# Altium PCB PCB2.PcbDoc
Units mm, origin at the board's own origin, x right, y up, seen from the top; angles counter-clockwise.
Board outline 99.57 x 42.8 mm, 2 copper layers (Top Layer, Bottom Layer); 8 components, 11 nets, 25 pads, 4 vias.
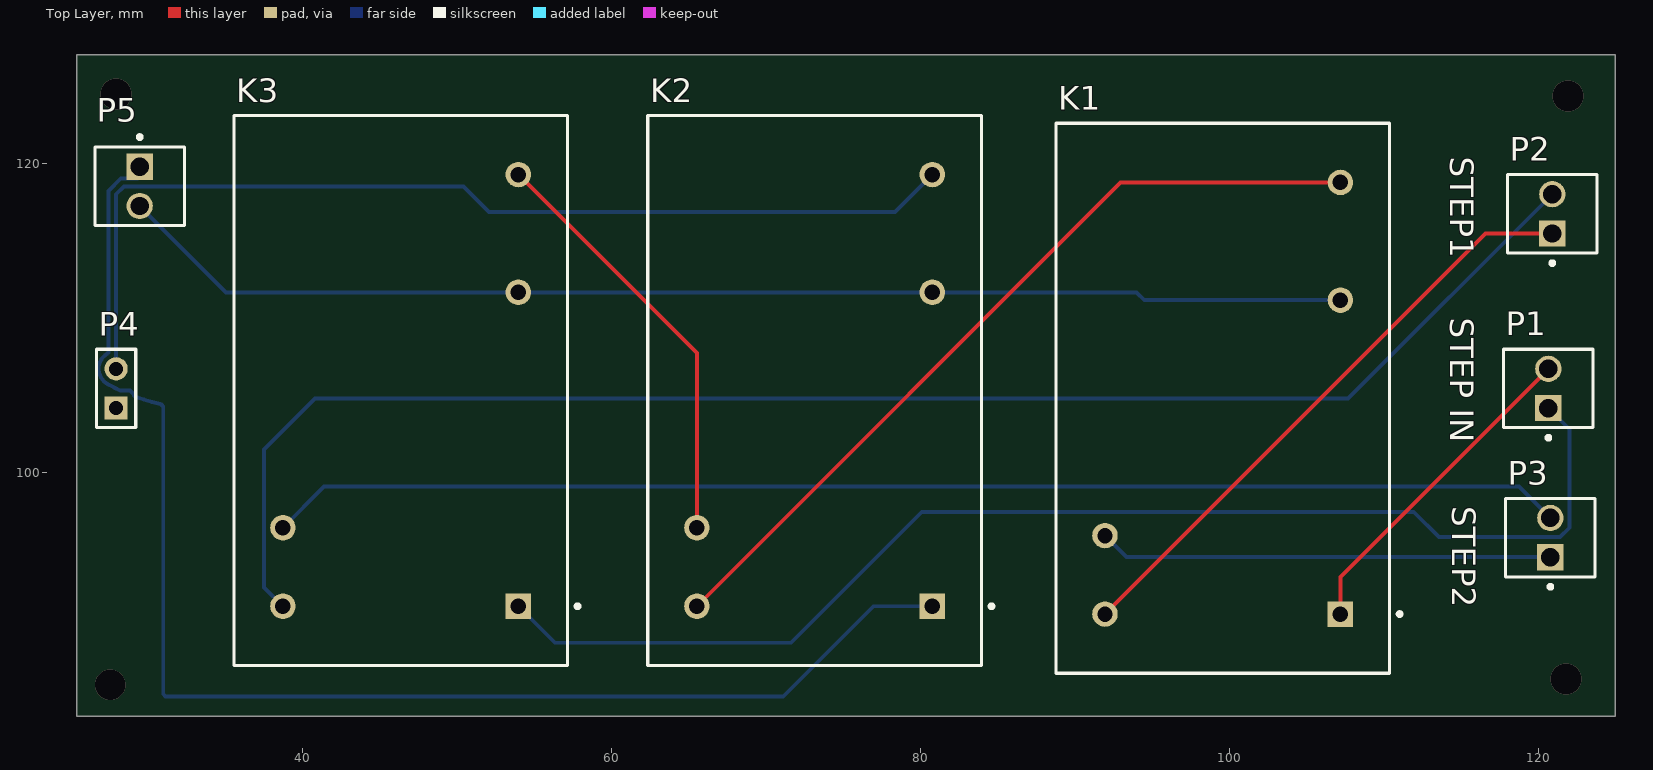
[diagram p0: Top Layer view]
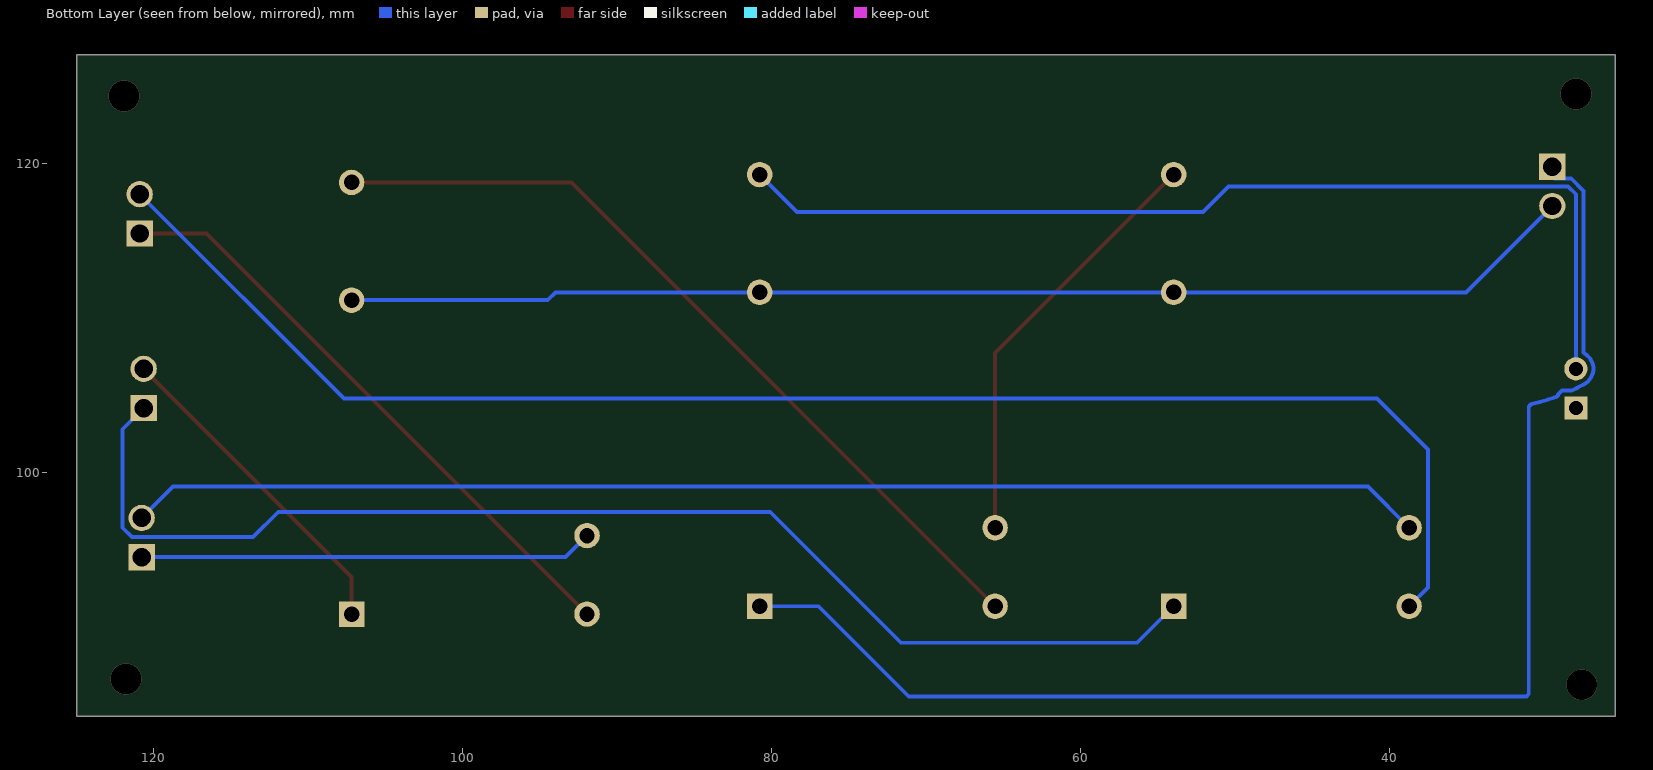
[diagram p1: Bottom Layer view, seen from below]
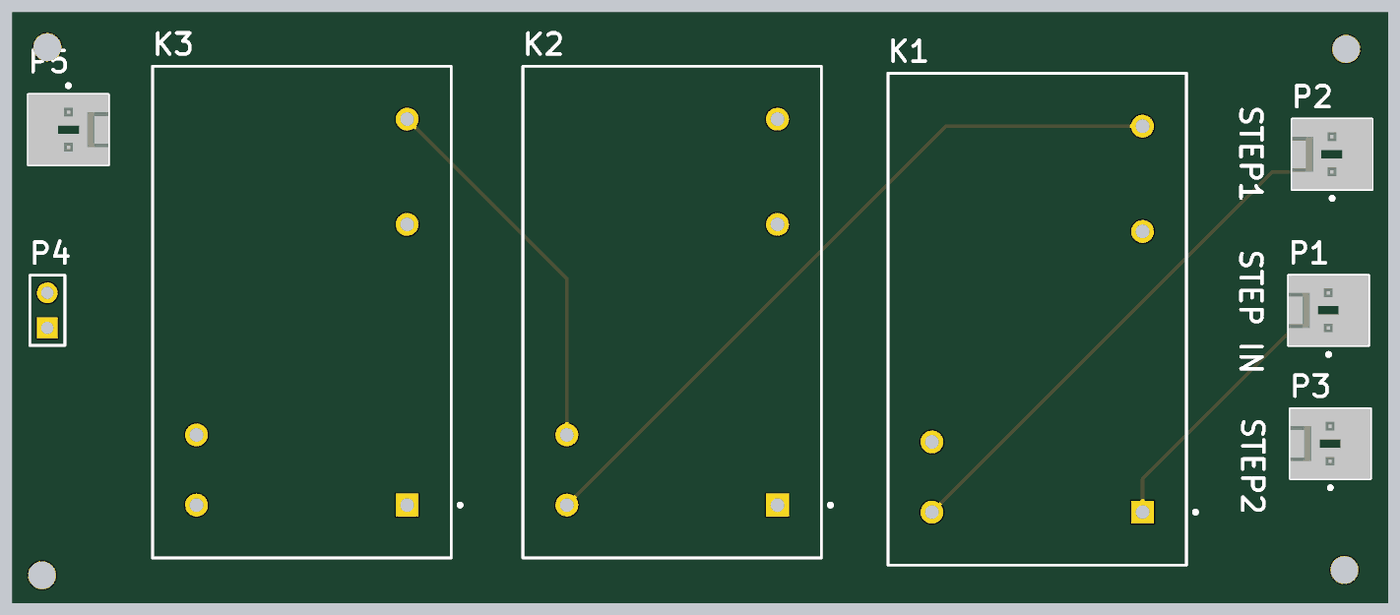
[diagram p2: 3D render of the assembled board from above, using the file's embedded part models]

## Layer stack, top to bottom
Top Solder: solder mask 0.0102, Solder Resist, Dk 3.5
Top Layer: signal copper 0.0356
Dielectric 1: dielectric 0.32, FR-4, Dk 4.8
Bottom Layer: signal copper 0.0356
Bottom Solder: solder mask 0.0102, Solder Resist, Dk 3.5

## Board outline
25.4,84.201 124.968,84.201 124.968,127 25.4,127

## Design rules (kind name [scope] priority, off if disabled: settings)
Clearance [All] p1: gap=0.254 ignorepadtopadclearanceinfootprint=FALSE except(0: Arc-Hole Track-Hole SMDPad-Hole THPad-Hole Via-Hole Fill-Hole Poly-Hole Region-Hole Text-Hole)
PolygonConnect [All] p1: connectstyle=Relief reliefconductorwidth=0.254 reliefentries=4 polygonreliefangle="90 Angle" airgapwidth=0.254
RoutingVias [All] p1: holewidth=0.711 width=1.27 viastyle="Through Hole" minholewidth=0.711 minwidth=1.27 maxholewidth=0.711 maxwidth=1.27
SolderMaskExpansion [All] p1: expansion=0.102 istentingtop=FALSE
Width [All] p1: maxlimit=0.254 minlimit=0.254 preferedwidth=0.254
30 further rules are at their usual default settings.

## Components (designator, comment, footprint, x,y, rotation, side; value= is the part's Value field where it differs from the comment)
K1 "Relay-SPDT" MODULE5B 99.568,104.775 r90 top
K2 "Relay-SPDT" MODULE5B 73.152,105.283 r90 top
K3 "Relay-SPDT" MODULE5B 46.355,105.283 r90 top
P1 "22-27-2021" MOLX-22-27-2021_V 120.65,105.41 r90 top
P2 "22-27-2021" MOLX-22-27-2021_V 120.904,116.713 r90 top
P3 "22-27-2021" MOLX-22-27-2021_V 120.777,95.758 r90 top
P4 "Header 2" HDR1X2 27.94,104.14 r90 top
P5 "22-27-2021" MOLX-22-27-2021_V 29.464,118.491 r270 top

## Footprints (in the part's own frame and the unit in brackets; to place one, negate y for a bottom-side part, rotate by r counter-clockwise, add the part's x,y. Pads: shape width x height; smd on the part's side, far side on the other; paste and mask are expansions set on the pad)
HDR1X2 [mm] "Connector; Header; 2 Position"
  rect 1.5x1.5 hole 0.9: 1(0,0)
  round 1.5 hole 0.9: 2(2.54,0)
  silkscreen extent -1.27,-1.27 3.81,1.27
MODULE5B [mm] "DIP; 5 Round Pins; Row Space 15.24 mm; Pitch 2.54 mm"
  rect 1.65x1.65 hole 1: 1(-13.97,-7.62)
  round 1.65 hole 1: 2(-13.97,7.62) 3(-8.89,7.62) 4(13.97,-7.62) 5(6.35,-7.62)
  silkscreen extent -17.8,-11.58 17.8,10.8, body extent -17.8,-10.8 17.8,10.8, height 14
MOLX-22-27-2021_V [mm] "Header, 2-Leads, Body 5.8x5.08mm"
  rect 1.7x1.7 hole 1.19: 1(-1.27,0)
  round 1.7 hole 1.19: 2(1.27,0)
  silkscreen extent -3.31,-2.9 2.54,2.9, body extent -2.54,-2.9 2.54,2.9, height 11.72

## Part data
K1 K2 K3: "Single-Pole Dual-Throw Relay", LatestRevisionDate=17-Jul-2002, LatestRevisionNote="Re-released for DXP Platform.", PackageReference=MODULE5B, Published=24-Mar-1999, Publisher="Altium Limited"
P1 P2 P3 P5: library part CMP-2000-05537-1, "Male Header, Pitch 2.54 mm, 1 x 2 Position, Height 11.7 mm, Tail Length 3.56 mm, 0 to 75 degC, RoHS, Bulk", Current - Max=4A, Manufacturer=Molex, Operating temperature=0°Cto+75°C, Package Description="2-Leads Header, Body 5.08 x 5.8 mm, Pitch 2.54 mm", Package Version="Rev. BC, 02/2012", PartNumber=0022272021, Voltage - Max=250V, Contact material=Tinplatedbrass, Current rating=4A, Datasheet URL=http://www.molex.com/pdm_docs/sd/022272021_sd.pdf, Datasheet Version="Rev. F, 06/2009", Housing material=Nylon(UL94V-0), Manufacturer URL=http://www.molex.com/, Mounting Technology=ThroughHole, No. of Positions=2, No. of Rows=1, Orientation=Vertical, Package Reference=22-27-2021, Pitch=2.54mm, Voltage rating=250V
P4: "Header, 2-Pin", LatestRevisionDate=17-Jul-2002, LatestRevisionNote="Re-released for DXP Platform.", Publisher="Altium Limited"

## Via types
v1: diameter 2, hole 2, Top Layer to Bottom Layer, 4 vias

## Nets (pads, with @x,y where several pads share a name; then routed paths per layer and width w, separated by ;. In a path a pad name is that pad's centre, name@x,y a point inside that pad or via, vN(x,y) a via of type N, cw(c..) or ccw(c..) an arc to the next point about the centre after c; other vN are vias at no path point)
GND: K1.5 K2.5 K3.5 P5.2 | length 80.2
  Bottom Layer w0.254: P5.2 35.052,111.633 K3.5 K2.5 93.98,111.633 94.488,111.125 K1.5
NetK1_1: K1.1 P1.2 | length 21.5
  Top Layer w0.254: K1.1 107.188,93.218 P1.2
NetK1_2: K1.2 P2.1 | length 39.2
  Top Layer w0.254: K1.2 116.586,115.443 P2.1
NetK1_3: K1.3 P3.1 | length 29.4
  Bottom Layer w0.254: K1.3 93.345,94.488 P3.1
NetK1_4: K1.4 K2.2 | length 53
  Top Layer w0.254: K2.2 92.964,118.745 K1.4
NetK2_3: K2.3 K3.4 | length 27.6
  Top Layer w0.254: K3.4 65.532,107.696 K2.3
NetK2_4: K2.4 P4.2 | length 66
  Bottom Layer w0.254: P4.2 27.94,117.983 28.448,118.491 50.419,118.491 52.07,116.84 78.359,116.84 K2.4
NetK3_1: K3.1 P1.1 | length 81.8
  Bottom Layer w0.254: K3.1 56.337,88.951 71.628,88.951 80.086,97.409 111.938,97.409 113.563,95.783 121.412,95.783 122.022,96.393 122.022,102.768 P1.1
NetK3_2: K3.2 P2.2 | length 100.9
  Bottom Layer w0.254: K3.2 37.516,92.532 37.516,101.448 40.818,104.75 107.671,104.75 P2.2
NetK3_3: K3.3 P3.2 | length 84
  Bottom Layer w0.254: K3.3 41.402,99.06 118.745,99.06 P3.2
VCC: K2.1 P5.1 | length 90.8
  Bottom Layer w0.254: 27.394,105.69 cw(c27.94,106.68) 26.966,106.105 cw(c27.937,106.685) 27.358,107.657 27.432,107.731 27.432,118.193 28.238,118.999 29.315,118.999 29.315,119.038 P5.1 ; 27.395,105.689 ccw(c33.74,117.245) 28.224,105.271 28.848,105.271 29.071,105.048 ccw(c29.321,105.094) 29.232,104.856 ccw(c33.74,117.245) 30.792,104.396 cw(c30.734,104.148) 30.967,104.25 30.987,104.205 30.988,104.155 cw(c30.734,104.148) 30.988,104.148 30.988,85.62 31.137,85.471 71.12,85.471 76.962,91.313 K2.1
pads on no net: P4.1
copper on no net:
  other v1: 27.559,86.233 121.793,86.614 121.92,124.333 27.94,124.46

## Silkscreen, mask and mechanical layers (free items; w line width, h text height)
Top Overlay:
  text "STEP1" at 114.3,120.396 h1.52 r270
  text "STEP IN" at 114.3,109.982 h1.52 r270
  text "STEP2" at 114.427,97.79 h1.52 r270